# Altium PCB PCB1.PcbDoc
Units mil, origin at the board's own origin, x right, y up, seen from the top; angles counter-clockwise.
Board outline 6000 x 2250 mil, 2 copper layers (Top Layer, Bottom Layer); 8 components, 15 nets, 40 pads, 0 vias.
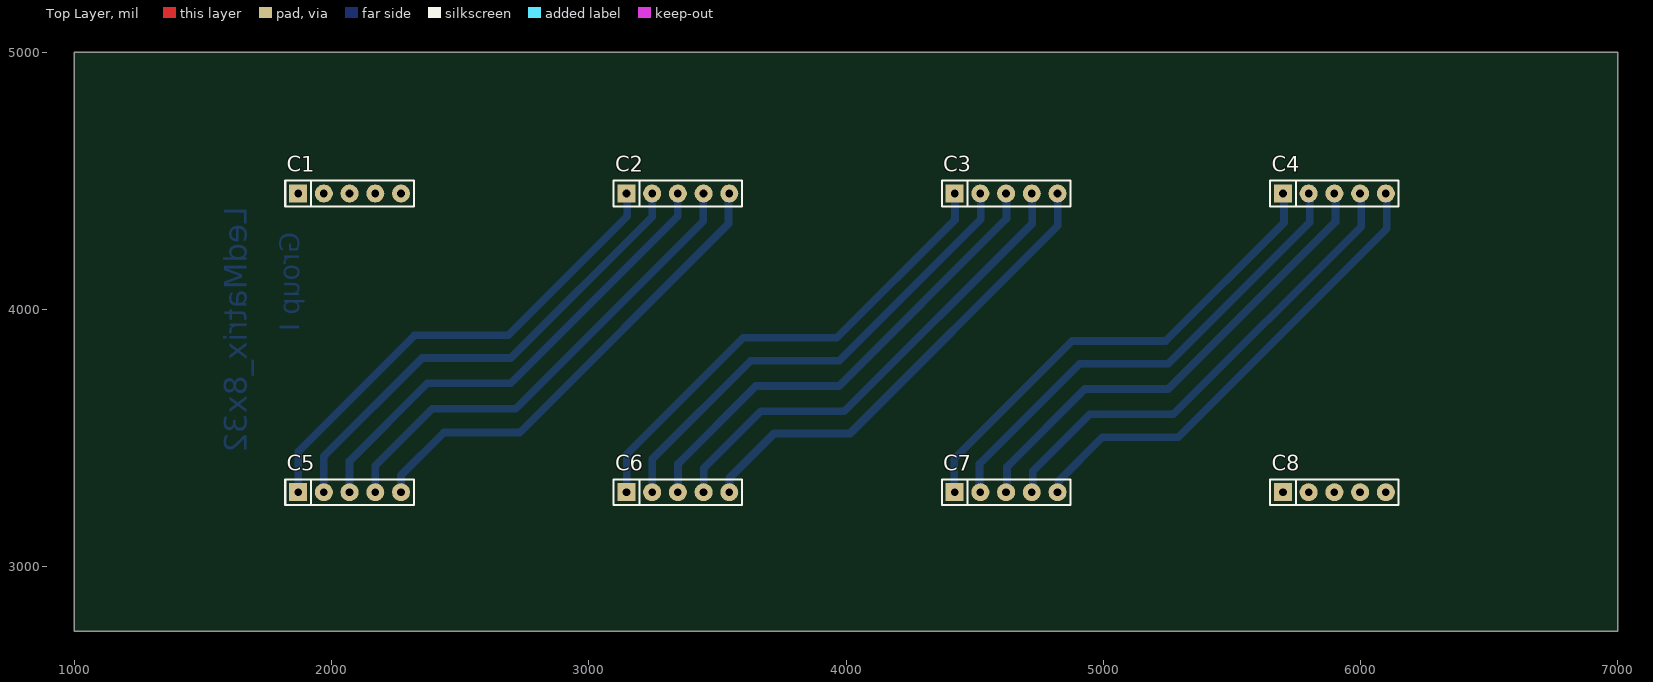
[diagram p0: Top Layer view]
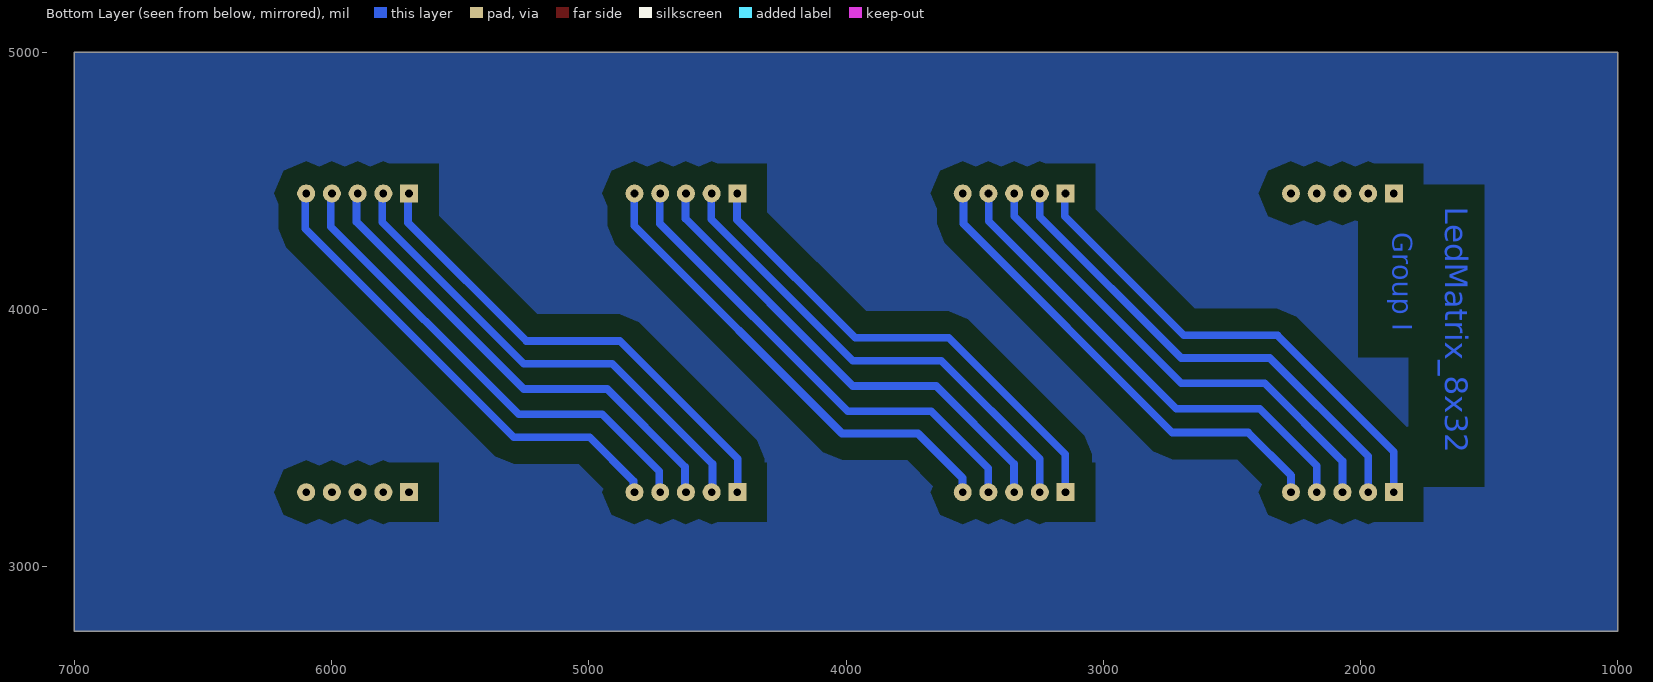
[diagram p1: Bottom Layer view, seen from below]
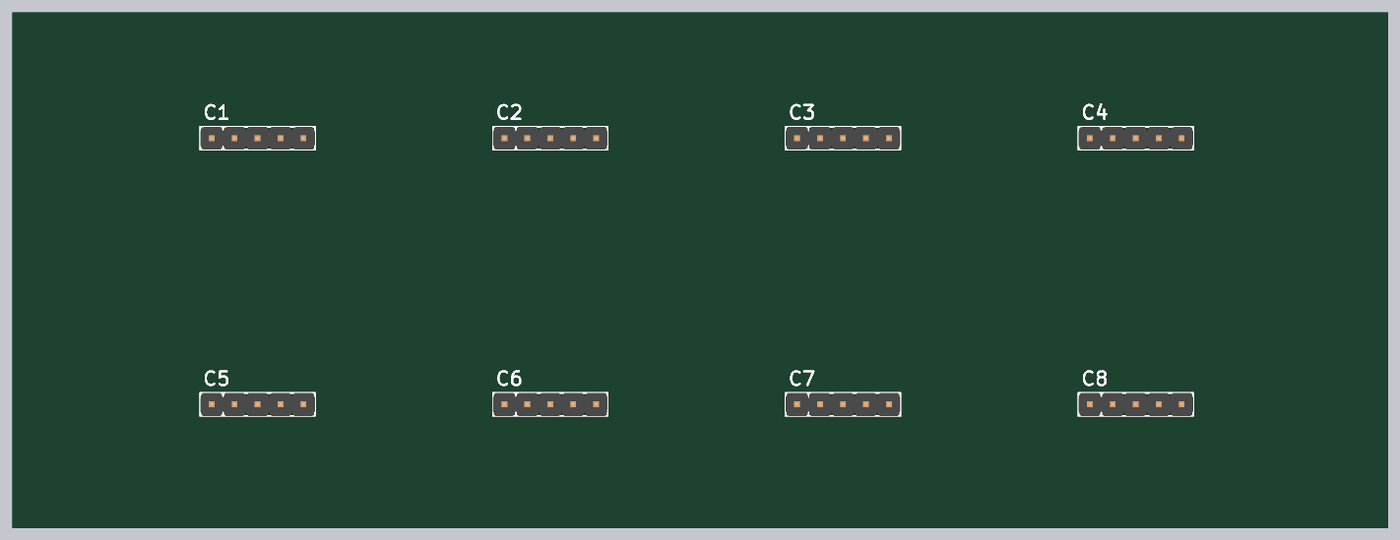
[diagram p2: 3D render of the assembled board from above, using the file's embedded part models]

## Layer stack, top to bottom
Top Solder: solder mask 0.4, Solder Resist, Dk 3.5
Top Layer: signal copper 1.4
Dielectric 1: dielectric 12.6, FR-4, Dk 4.8
Bottom Layer: signal copper 1.4
Bottom Solder: solder mask 0.4, Solder Resist, Dk 3.5

## Board outline
1000,2750 1000,5000 7000,5000 7000,2750

## Design rules (kind name [scope] priority, off if disabled: settings)
Clearance Clearance_1 [All vs InPolygon] p1: gap=80
Clearance [All] p2: gap=30
PolygonConnect [All] p1: connectstyle=Relief reliefconductorwidth=10 reliefentries=4 polygonreliefangle="90 Angle" airgapwidth=10
RoutingLayers [All] p1: top layer_v5=FALSE bottom layer_v5=TRUE
RoutingVias [All] p1: holewidth=28 width=80 viastyle="Through Hole" minholewidth=28 minwidth=80 maxholewidth=28 maxwidth=80
SolderMaskExpansion [All] p1: expansion=4
Width [All] p1: maxlimit=40 minlimit=30 preferedwidth=40
29 further rules are at their usual default settings.

## Components (designator, comment, footprint, x,y, rotation, side; value= is the part's Value field where it differs from the comment)
C1 "JP5" JP5-D1T 1870.08,4451.18 r0 top
C2 "JP5" JP5-D1T 3146.36,4451.18 r0 top
C3 "JP5" JP5-D1T 4422.29,4451.18 r0 top
C4 "JP5" JP5-D1T 5698.57,4451.18 r0 top
C5 "JP5" JP5-D1T 1870.08,3289.76 r0 top
C6 "JP5" JP5-D1T 3146.36,3289.76 r0 top
C7 "JP5" JP5-D1T 4422.29,3289.76 r0 top
C8 "JP5" JP5-D1T 5698.57,3289.76 r0 top

## Footprints (in the part's own frame and the unit in brackets; to place one, negate y for a bottom-side part, rotate by r counter-clockwise, add the part's x,y. Pads: shape width x height; smd on the part's side, far side on the other; paste and mask are expansions set on the pad)
JP5-D1T [mil] "5 pins, 1 row, straight, gold plating"
  rect 70x70 hole 30: 1(0,0)
  round 70 hole 30: 2(100,0) 3(200,0) 4(300,0) 5(400,0)
  silkscreen extent -50,-50 450,50, body extent -50,-50 450,50, height 336

## Part data
C1 C2 C3 C4 C5 C6 C7 C8: "WR-PHD 2.54 mm Angled Socket Header"

## Nets (pads, with @x,y where several pads share a name; then routed paths per layer and width w, separated by ;. In a path a pad name is that pad's centre, name@x,y a point inside that pad or via, vN(x,y) a via of type N, cw(c..) or ccw(c..) an arc to the next point about the centre after c; other vN are vias at no path point)
NetC2_1: C2.1 C5.1 | length 1906.1
  Bottom Layer w30: C5.1 1870.08,3447.24 2322.83,3900 2687.01,3900 3149.61,4362.6 3149.61,4447.94 C2.1
NetC2_2: C2.2 C5.2 | length 1891.9
  Bottom Layer w30: C5.2 1970.08,3429.13 2352.36,3811.42 2696.85,3811.42 3246.36,4360.93 C2.2
NetC2_3: C2.3 C5.3 | length 1880.3
  Bottom Layer w30: C5.3 2070.08,3411.02 2372.05,3712.99 2696.85,3712.99 3346.36,4362.5 C2.3
NetC2_4: C2.4 C5.4 | length 1880.3
  Bottom Layer w30: C5.4 2170.08,3392.91 2391.73,3614.57 2716.54,3614.57 3444.88,4342.91 3444.88,4449.7 C2.4
NetC2_5: C2.5 C5.5 | length 1863
  Bottom Layer w30: C5.5 2270.08,3355.12 2436.65,3521.68 2731.92,3521.68 3543.31,4333.07 3543.31,4448.13 C2.5
NetC3_1: C3.1 C6.1 | length 1903.4
  Bottom Layer w30: C6.1@3147.28,3289.76 3147.28,3437.14 3600.03,3889.9 3964.2,3889.9 4423.56,4349.25 C3.1@4423.56,4451.18
NetC3_2: C3.2 C6.2 | length 1891.9
  Bottom Layer w30: C6.2@3247.28,3289.76 3247.28,3419.03 3629.56,3801.31 3974.05,3801.31 4523.56,4350.83 C3.2@4523.56,4451.18
NetC3_3: C3.3 C6.3 | length 1880.3
  Bottom Layer w30: C6.3@3347.28,3289.76 3347.28,3400.92 3649.24,3702.89 3974.05,3702.89 4623.56,4352.4 C3.3@4623.56,4451.18
NetC3_4: C3.4 C6.4 | length 1880.3
  Bottom Layer w30: C6.4@3447.28,3289.76 3447.28,3382.81 3668.93,3604.46 3993.73,3604.46 4723.56,4334.29 C3.4@4723.56,4451.18
NetC3_5: C3.5 C6.5 | length 1863
  Bottom Layer w30: C6.5@3547.28,3289.76 3547.28,3345.02 3720.26,3518 4015.54,3518 4823.56,4326.02 C3.5@4823.56,4451.18
NetC4_1: C4.1 C7.1 | length 1908.3
  Bottom Layer w30: C7.1@4426.28,3289.76 4420.36,3295.68 4420.36,3419.23 4879.03,3877.9 5243.2,3877.9 5702.56,4337.25 C4.1@5702.56,4451.18
NetC4_2: C4.2 C7.2 | length 1897.6
  Bottom Layer w30: C7.2@4526.28,3289.76 4519.36,3296.68 4519.36,3400.12 4908.56,3789.31 5253.05,3789.31 5802.56,4338.83 C4.2@5802.56,4451.18
NetC4_3: C4.3 C7.3 | length 1880.3
  Bottom Layer w30: C7.3@4626.28,3289.76 4626.28,3388.92 4928.24,3690.89 5253.05,3690.89 5902.56,4340.4 C4.3@5902.56,4451.18
NetC4_4: C4.4 C7.4 | length 1880.3
  Bottom Layer w30: C7.4@4726.28,3289.76 4726.28,3370.81 4947.93,3592.46 5272.73,3592.46 6002.56,4322.29 C4.4@6002.56,4451.18
NetC4_5: C4.5 C7.5 | length 1863
  Bottom Layer w30: C7.5@4826.28,3289.76 4826.28,3333.02 4996.26,3503 5291.54,3503 6102.56,4314.02 C4.5@6102.56,4451.18
pads on no net: C1.1 C1.2 C1.3 C1.4 C1.5 C8.1 C8.2 C8.3 C8.4 C8.5

## Polygon pours and split planes (outlines as drawn)
no net on Bottom Layer "Mechanical 1-No Net" (solid, pour order 2): 1000,5000 7000,5000 7000,2750 1000,2750 1000,5000

## Other copper
Bottom Layer:
  text "LedMatrix_8x32" at 1700,4400 h150 r90
  text "Group I" at 1900,4300 h130 r90